# Altium PCB pcb3.PcbDoc
Units mm, origin at the board's own origin, x right, y up, seen from the top; angles counter-clockwise.
Board outline 67.69 x 153.16 mm, 2 copper layers (Top Layer, Bottom Layer); 98 components, 34 nets, 245 pads, 231 vias.
Unrouted connection lines stored in the file: 71.
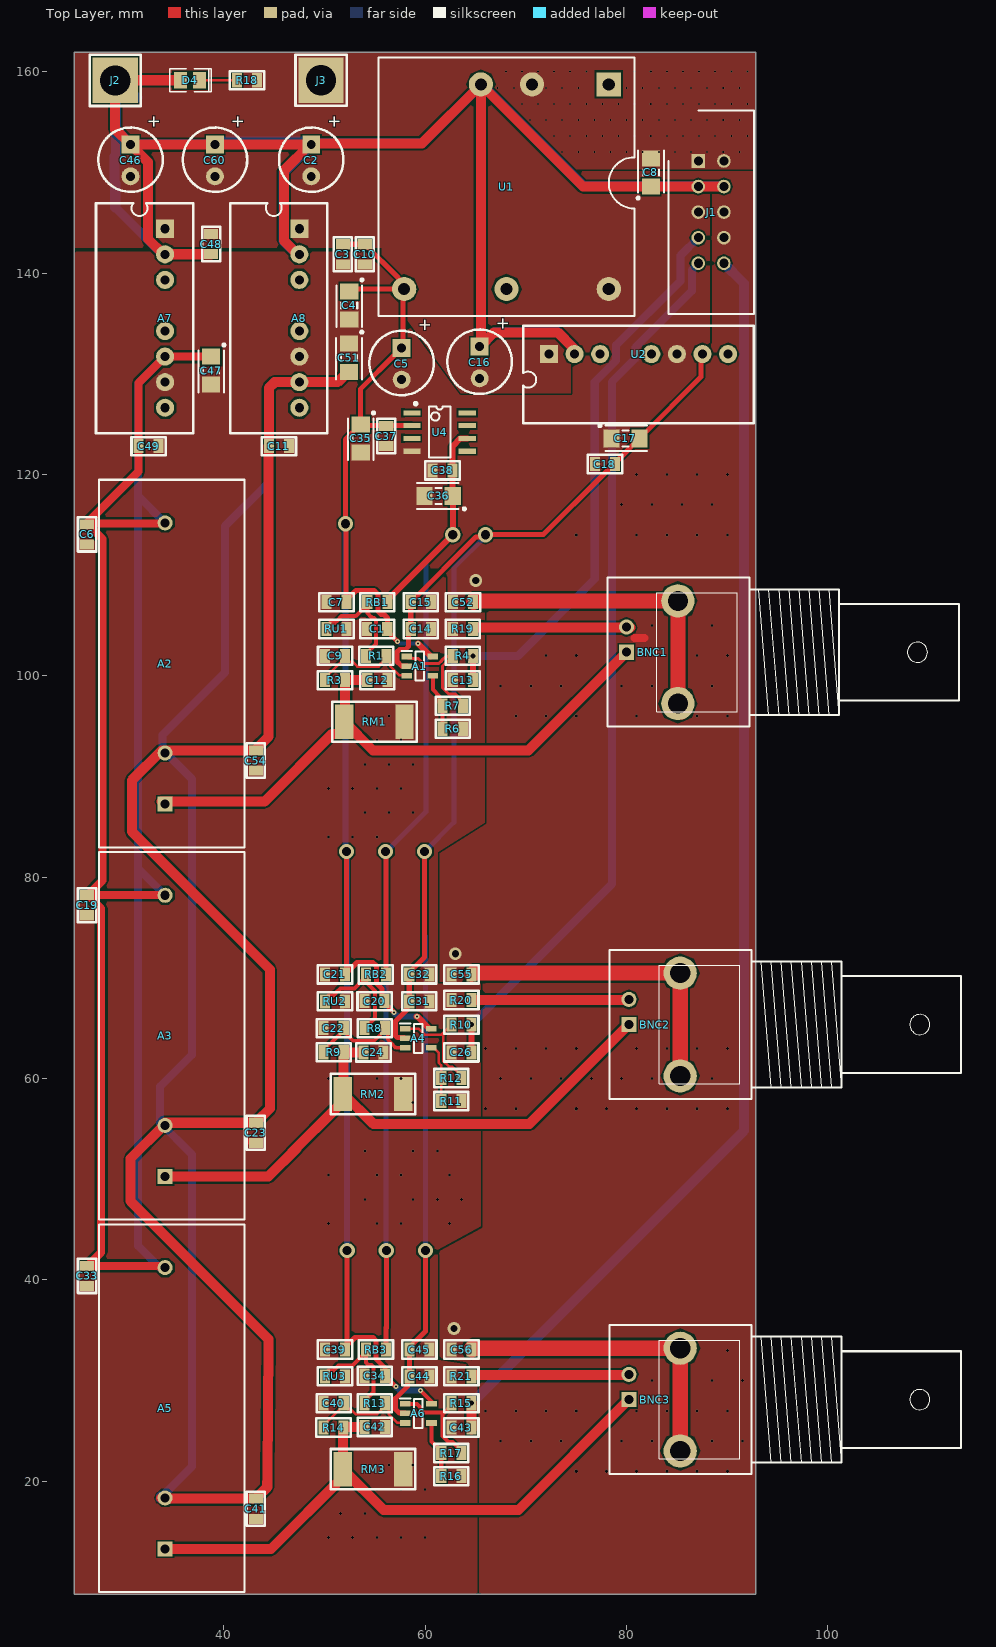
[diagram p0: Top Layer view]
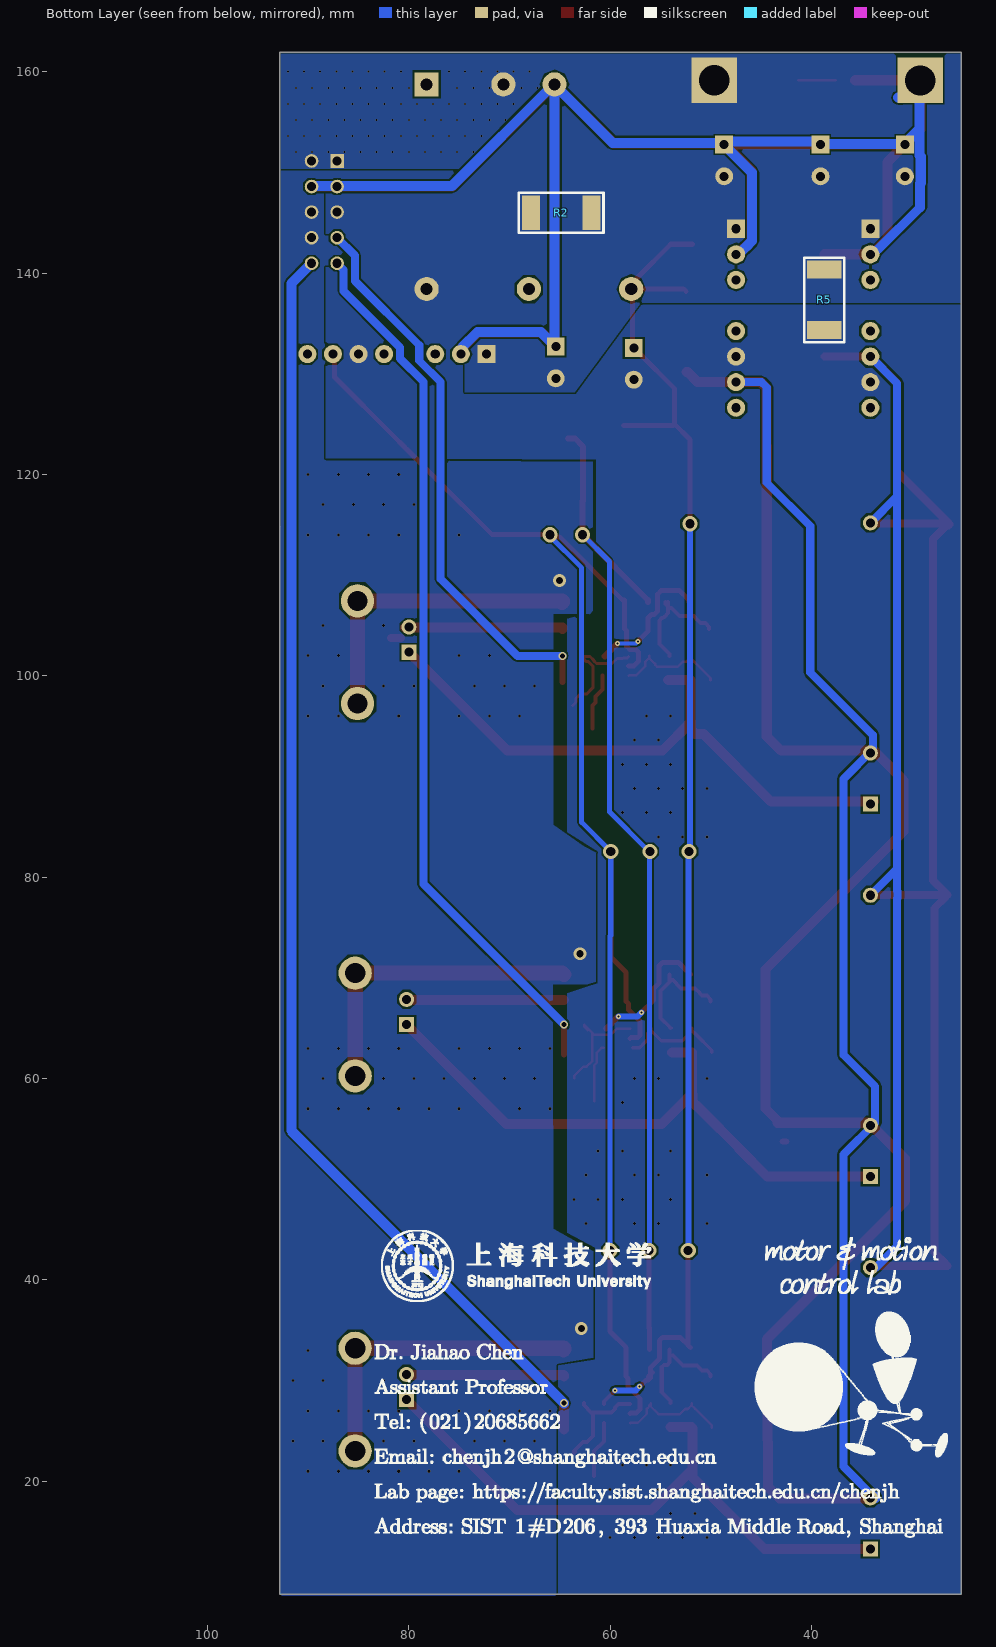
[diagram p1: Bottom Layer view, seen from below]

## Layer stack, top to bottom
Top Solder: solder mask 0.0102, Solder Resist, Dk 3.5
Top Layer: signal copper 0.0356
Dielectric 1: dielectric 0.32, FR-4, Dk 4.8
Bottom Layer: signal copper 0.0356
Bottom Solder: solder mask 0.0102, Solder Resist, Dk 3.5

## Board outline
25.146,8.763 92.837,8.763 92.837,161.925 25.146,161.925

## Design rules (kind name [scope] priority, off if disabled: settings)
AssemblyTestpoint [All] p1: testpointundercomponent=TRUE minsize=1.016 maxsize=0.4 preferedsize=1.524 minholesize=0 maxholesize=1.016 preferedholesize=0.813 testpointgrid=0.025 usegrid=TRUE gridtolerance=0 allowsidetop=TRUE allowsidebottom=TRUE
Clearance [All] p1: gap=0.19 ignorepadtopadclearanceinfootprint=TRUE
ComponentClearance [All] p1: gap=0.254 collisioncheckmode=3 verticalgap=0.2 showdistances=FALSE
FabricationTestpoint [All] p1: side=3 testpointundercomponent=TRUE minsize=1.016 maxsize=0.4 preferedsize=1.524 minholesize=0 maxholesize=1.016 preferedholesize=0.813 testpointgrid=0.025 allowsidetop=TRUE allowsidebottom=TRUE usegrid=TRUE gridtolerance=0
HoleToHoleClearance [All] p1: gap=0.3 allowstackedmicrovias=TRUE
PlaneClearance [All] p1: clearance=0.2
PlaneConnect [All] p1: planeconnectstyle=Direct reliefexpansion=0.508 reliefentries=4 reliefconductorwidth=0.254 reliefairgap=0.254
PolygonConnect [All] p1: connectstyle=Direct reliefconductorwidth=0.254 reliefentries=4 polygonreliefangle="90 Angle" airgapwidth=0.254
RoutingVias [All] p1: holewidth=0.711 width=1.27 viastyle="Through Hole" minholewidth=0.711 minwidth=1.27 maxholewidth=0.711 maxwidth=1.27
SilkToSolderMaskClearance [IsPad] p1: minsilkscreentomaskgap=0.2 clearancetoexposedcopper=TRUE
SolderMaskExpansion [All] p1: expansion=0.102 istentingtop=FALSE
UnRoutedNet [All] p1: checkbadconnections=TRUE
Width [All] p1: maxlimit=10 minlimit=0.254 preferedwidth=0.254
22 further rules are at their usual default settings.

## Components (designator, comment, footprint, x,y, rotation, side; value= is the part's Value field where it differs from the comment)
A1 "LTC6240HV" SOT95P280X100-5N 59.466,100.965 r0 top
A2 "LA55-P" XDCR_LA55-P 34.838,101.219 r90 top
A3 "LA55-P" XDCR_LA55-P 34.838,64.233 r90 top
A4 "LTC6240HV" SOT95P280X100-5N 59.319,63.988 r0 top
A5 "LA55-P" XDCR_LA55-P 34.838,27.248 r90 top
A6 "LTC6240HV" SOT95P280X100-5N 59.321,26.74 r0 top
A7 "VRB1215S-6WR3" VRB_S-6WR3 34.163,144.399 r0 top
A8 "VRB1215S-6WR3" VRB_S-6WR3 47.498,144.399 r0 top
BNC1 "BNC" BNC 79.99,102.342 r180 top
BNC2 "BNC" BNC 80.224,65.365 r180 top
BNC3 "BNC" BNC 80.226,28.117 r180 top
C1 "105" 0805#1 55.229,104.648 r0 top value=101
C2 "100uf 25V 贴片铝电解" "CAP/6.4mm -" 48.682,153.797 r270 top
C3 "105" 0805#1 51.816,141.859 r270 top value=0.1UF
C4 "22uf 16V" "1206 (钽电容)" 52.451,138.182 r270 top
C5 "100uf 25V 贴片铝电解" "CAP/6.4mm -" 57.658,133.604 r270 top
C6 "47nf" 0805#1 26.416,114.046 r90 top
C7 "103" 0805#1 51.181,107.315 r0 top value=101
C8 "22uf 16V" "1206 (钽电容)" 82.423,148.59 r90 top
C9 "101" 0805#1 51.054,101.981 r180 top
C10 "104" 0805#1 53.991,141.859 r90 top
C11 "47nf" 0805#1 45.466,122.809 r180 top
C12 "104" 0805#1 55.245,99.568 r0 top
C13 "103" 0805#1 63.738,99.568 r0 top value=101
C14 "103" 0805#1 59.563,104.648 r180 top value=101
C15 "105" 0805#1 59.563,107.315 r180 top value=101
C16 "100uf 25V 贴片铝电解" "CAP/6.4mm -" 65.405,133.731 r270 top
C17 "22uf 16V" "1206 (钽电容)" 78.486,123.571 r0 top
C18 "104" 0805#1 77.851,121.031 r0 top value=0.1UF
C19 "47nf" 0805#1 26.416,77.216 r90 top
C20 "105" 0805#1 54.975,67.691 r0 top value=101
C21 "103" 0805#1 51.034,70.338 r0 top value=101
C22 "101" 0805#1 50.907,65.004 r180 top
C23 "47nf" 0805#1 43.18,54.61 r270 top
C24 "104" 0805#1 54.86,62.591 r0 top
C26 "103" 0805#1 63.591,62.591 r0 top value=101
C31 "103" 0805#1 59.416,67.671 r180 top value=101
C32 "105" 0805#1 59.416,70.338 r180 top value=101
C33 "47nf" 0805#1 26.416,40.402 r90 top
C34 "105" 0805#1 54.991,30.48 r0 top value=101
C35 "106 25V" "1206 (钽电容)" 53.594,124.968 r270 top value=100pF
C36 "106 25V" "1206 (钽电容)" 62.738,117.856 r180 top value=100pF
C37 "104" 0805#1 56.134,123.809 r90 top
C38 "104" 0805#1 61.722,120.396 r0 top
C39 "103" 0805#1 51.036,33.09 r0 top value=101
C40 "101" 0805#1 50.909,27.756 r180 top
C41 "47nf" 0805#1 43.18,17.272 r270 top
C42 "104" 0805#1 54.991,25.4 r0 top
C43 "103" 0805#1 63.593,25.343 r0 top value=101
C44 "103" 0805#1 59.418,30.423 r180 top value=101
C45 "105" 0805#1 59.418,33.09 r180 top value=101
C46 "100uf 25V 贴片铝电解" "CAP/6.4mm -" 30.734,153.797 r270 top
C47 "22uf 16V" "1206 (钽电容)" 38.735,131.711 r270 top
C48 "104" 0805#1 38.735,142.875 r270 top value=101
C49 "104" 0805#1 32.528,122.809 r0 top value=0.1UF
C51 "22uf 16V" "1206 (钽电容)" 52.428,132.983 r270 top
C52 "102" 0805#1 63.754,107.315 r180 top
C54 "104" 0805#1 43.18,91.583 r90 top value=0.1UF
C55 "102" 0805#1 63.607,70.338 r180 top
C56 "102" 0805#1 63.609,33.09 r180 top
C60 "100uf 25V 贴片铝电解" "CAP/6.4mm -" 39.116,153.797 r270 top
D4 "LED0" l0805 35.692,159.149 r180 top
J1 "HIF3FC-10PA-2.54DSA_71_" SHDR10W50P254_2X5_2020X850X920P 87.122,151.13 r270 top
J2 "Header 2" 接地柱M3 29.21,159.131 r0 top
J3 "Header 2" 接地柱M3 49.657,159.149 r0 top
R1 "20k" 0805#1 55.134,101.981 r0 top value=10K
R2 "DNP" 2512 64.77,145.669 r0 bottom
R3 "10k" 0805#1 51.038,99.568 r180 top value=10K
R4 "470R" 0805#2 63.738,101.981 r180 top
R5 "DNP" 2512 38.411,137.432 r270 bottom
R6 "20k" 0805#1 62.738,94.742 r180 top value=10K
R7 "10k" 0805#1 62.738,97.028 r180 top value=10K
R8 "20k" 0805#1 54.987,65.004 r0 top value=10K
R9 "10k" 0805#1 50.911,62.611 r180 top value=10K
R10 "470R" 0805#2 63.591,65.353 r180 top
R11 "20k" 0805#1 62.591,57.765 r180 top value=10K
R12 "10k" 0805#1 62.591,60.051 r180 top value=10K
R13 "20k" 0805#1 54.989,27.756 r0 top value=10K
R14 "10k" 0805#1 50.893,25.343 r180 top value=10K
R15 "470R" 0805#2 63.593,27.756 r180 top
R16 "20k" 0805#1 62.593,20.517 r180 top value=10K
R17 "10k" 0805#1 62.593,22.803 r180 top value=10K
R18 "1k" 0805#1 42.307,159.149 r180 top value=1K
R19 "0R" 0805#1 63.738,104.648 r0 top value=10K
R20 "0R" 0805#1 63.591,67.798 r0 top value=10K
R21 "0R" 0805#1 63.593,30.423 r0 top value=10K
RB1 "0R" 0805#1 55.245,107.315 r180 top value=10K
RB2 "0R" 0805#1 55.098,70.338 r180 top value=10K
RB3 "0R" 0805#1 55.1,33.09 r180 top value=10K
RM1 "24R 1%精度" 2512 54.864,95.758 r0 top value=3.3K
RM2 "24R 1%精度" 2512 54.717,58.781 r0 top value=3.3K
RM3 "24R 1%精度" 2512 54.719,21.533 r0 top value=3.3K
RU1 "DNP" 0805#1 51.181,104.648 r0 top value=10K
RU2 "DNP" 0805#1 51.034,67.671 r0 top value=10K
RU3 "DNP" 0805#1 51.036,30.423 r0 top value=10K
U1 "URB2405YMD-15W" URB-YMD-15WR3 78.232,158.733 r270 top
U2 "VRB1205S-6WR3" VRB_S-6WR3 72.295,131.953 r90 top
U4 "ADR423ARZ" SOIC-8 58.674,126.111 r0 top value=Value

## Footprints (in the part's own frame and the unit in brackets; to place one, negate y for a bottom-side part, rotate by r counter-clockwise, add the part's x,y. Pads: shape width x height; smd on the part's side, far side on the other; paste and mask are expansions set on the pad)
0805#1 [mm]
  rect 1x1.4 smd: 1(-1,0) 2(1,0)
  silkscreen extent -1.7,-0.9 1.7,0.9
0805#2 [mm]
  rect 1x1.4 smd mask+0.102: 1(-1,0)
  rect 1x1.4 smd: 2(1,0)
  silkscreen extent -1.7,-0.9 1.7,0.9
"1206 (钽电容)" [mm]
  rect 1.6x1.8 smd: 1(0,0) 2(2.8,0)
  silkscreen extent -1.27,-1.27 3.56,1.4
2512 [mm]
  rect 1.8x3.4 smd: 1(-2.903,-0.324) 2(3.097,-0.324)
  silkscreen extent -4.1,-2.32 4.3,1.68
BNC [mm]
  rect 1.5x1.5 hole 0.9: 1(0,0)
  round 1.5 hole 0.9: 2(0,-2.5)
  round 3.3 hole 2: 3(-5.1,5.1) 4(-5.1,-5.1)
  silkscreen extent -33,-7.4 1.9,7.4
"CAP/6.4mm -" [mil]
  rect 70x70 hole 35: 1(41,0)
  round 70 hole 35: 2(165,0)
  silkscreen extent -26,-126 226,126
l0805 [mm]
  rect 1.3x1.6 smd: 1(0,0) 2(-1.9,0)
  silkscreen extent -3.08,-1.15 1.05,1.15
SHDR10W50P254_2X5_2020X850X920P [mm]
  rect 1.35x1.35 hole 0.9: 1(0,0)
  round 1.35 hole 0.9: 2(0,2.54) 3(2.54,0) 4(2.54,2.54) 5(5.08,0) 6(5.08,2.54) 7(7.62,0) 8(7.62,2.54) 9(10.16,0) 10(10.16,2.54)
  silkscreen extent -5.02,-2.98 15.18,5.52, body extent -5.02,-2.98 15.18,5.52, height 9.2
SOIC-8 [mm]
  rect 1.7x0.51 smd: 1(0,0) 2(0,-1.27) 3(0,-2.54) 4(0,-3.81) 5(5.5,-3.81) 6(5.5,-2.54) 7(5.5,-1.27) 8(5.5,0)
  silkscreen extent 0.35,-4.44 3.82,0.94
SOT95P280X100-5N [mm]
  rect 1.05x0.55 smd: 1(-1.3,0.95) 2(-1.3,0) 3(-1.3,-0.95) 4(1.3,-0.95) 5(1.3,0.95)
  silkscreen extent -1.83,-1.45 0.43,1.48, body extent -1.4,-1.45 1.4,1.45, height 1
URB-YMD-15WR3 [mm]
  rect 2.4x2.4 hole 1.2: 1(0,0)
  round 2.4 hole 1.2: 2(0,-7.62) 3(0,-12.7) 4(20.32,-20.32) 5(20.32,-10.16) 6(20.32,0)
  silkscreen extent -2.67,-22.86 22.99,2.54
VRB_S-6WR3 [mm]
  rect 1.8x1.8 hole 0.9: 1(0,0)
  round 1.8 hole 0.9: 2(0,-2.54) 3(0,-5.08) 5(0,-10.16) 6(0,-12.7) 7(0,-15.24) 8(0,-17.78)
  silkscreen extent -6.86,-20.32 2.79,2.54
XDCR_LA55-P [mm]
  rect 1.5x1.5 hole 0.9: 1(-13.97,0.675)
  round 1.5 hole 0.9: 2(-8.89,0.675) 3(13.97,0.675)
  silkscreen extent -18.25,-7.22 18.25,7.22
接地柱M3 [mm]
  rect 4.5x4.5 hole 3: 1(0,0)
  silkscreen extent -2.54,-2.54 2.54,2.54

## Part data
A1 A4 A6: library part AO_LTC6240HV, "OP AMP, +-5.5V, 18MHZ, 10V/US, 5TSOT23", Package=sot23-5, Classe=IC, Codice produttore=LTC6240HVHS5#PBF, Farnell #=2294747, Produttore="LINEAR TECHNOLOGY"
A2 A3 A5: "Current Sensor 50A 1 Channel Hall Effect, Closed Loop Bidirectional Module, Single Pass Through", Package="Module LEM USA", Availability=Unavailable, MF="LEM USA", MP="LA 55-P", Price=None, SnapEDA_Link=https://www.snapeda.com/parts/LA%2055-P/LEM%20USA%20Inc./view-part/38924/?ref=snap
A7 A8 U1 U2: library part Component_1
  U1 U2: ClassName=Power
BNC1 BNC2 BNC3: "BNC Elbow Connector", LatestRevisionDate=17-Jul-2002, LatestRevisionNote="Re-released for DXP Platform.", Publisher="Altium Limited"
C1 C3 C7 C9 C13 C14 C15 C18 C20 C21 C22 C26 C31 C32 C34 C39 C40 C43 C44 C45 C48 C49 C54: library part Cap, "Capacitor", LatestRevisionDate=17-Jul-2002, LatestRevisionNote="Re-released for DXP Platform.", PackageReference=RAD-0.3, Published=8-Jun-2000, Publisher="Altium Limited"
  C3 C18: ClassName=Power
C2 C4 C5 C8 C16 C17 C46 C47 C51 C60: library part "Cap Pol1", "Polarized Capacitor (Radial)", LatestRevisionDate=17-Jul-2002, LatestRevisionNote="Re-released for DXP Platform.", Published=8-Jun-2000, Publisher="Altium Limited"
  C2 C4 C5 C16 C17: ClassName=Power
C6 C10 C11 C12 C19 C23 C24 C33 C37 C38 C41 C42 C52 C55 C56: library part "Cap Semi", "Capacitor (Semiconductor SIM Model)", LatestRevisionDate=17-Jul-2002, LatestRevisionNote="Re-released for DXP Platform.", PackageReference=C1206, Published=8-Jun-2000, Publisher="Altium Limited"
  C10 C37 C38: ClassName=Power
C35 C36: library part "Cap Pol3", "Polarized Capacitor (Surface Mount)", ClassName=Power, LatestRevisionDate=29-May-2009, LatestRevisionNote="IPC-7351 Footprint Added.", PackageDescription="Chip Capacitor", PackageReference=C0805, Published=8-Jun-2000, Publisher="Altium Limited"
D4: "Typical INFRARED GaAs LED", LatestRevisionDate=08-Jul-2005, LatestRevisionNote="Mech Layer 1 removed.", PackageDescription="LED; 2 Leads", PackageReference=LED-0, Published=8-Jun-2000, Publisher="Altium Limited"
J1: "Connector", Manufacturer_Name=Hirose, Manufacturer_Part_Number=HIF3FC-10PA-2.54DSA(71), Mouser Part Number=798-HIF3FC10PA254D71, Datasheet Link=https://componentsearchengine.com/Datasheets/1/HIF3FC-10PA-2.54DSA(71).pdf, Height=9.2mm, Mouser Price/Stock=https://www.mouser.co.uk/ProductDetail/Hirose-Connector/HIF3FC-10PA-2.54DSA71?qs=eDUdFcBPps26f2LJxn%252B8VA%3D%3D
J2 J3: library part "Header 2_1", "Header, 2-Pin", LatestRevisionDate=17-Jul-2002, LatestRevisionNote="Re-released for DXP Platform.", Publisher="Altium Limited"
R1 R2 R3 R4 R5 R6 R7 R8 R9 R10 R11 R12 R13 R14 R15 R16 R17 R18 R19 R20 R21 RB1 RB2 RB3 RM1 RM2 RM3 RU1 RU2 RU3: library part Res2, "Resistor", LatestRevisionDate=17-Jul-2002, LatestRevisionNote="Re-released for DXP Platform.", PackageReference=AXIAL-0.4, Published=8-Jun-2000, Publisher="Altium Limited"
  R2 R5: ClassName=Power
  R18 RM1 RM2 RM3: PackageDescription="Axial Device, Thru-Hole; 2 Leads; 0.4 in Pin Spacing"
U4: "Imported", ClassName=Power, Manufacturer_Part_Number=ADR423ARZ, RefDes=Refdes, Type=Type, Vendor=Vendor

## Via types
v1: diameter 0.3, hole 0.3, Top Layer to Bottom Layer, tented both sides, 128 vias
v2: diameter 0.2, hole 0.2, Top Layer to Bottom Layer, tented both sides, 82 vias
v3: diameter 1.5, hole 0.9, Top Layer to Bottom Layer, 9 vias
v4: diameter 0.5, hole 0.2, Top Layer to Bottom Layer, tented both sides, 6 vias
v5: diameter 0.8, hole 0.5, Top Layer to Bottom Layer, 3 vias
v6: diameter 1.27, hole 0.711, Top Layer to Bottom Layer, 3 vias

## Nets (pads, with @x,y where several pads share a name; then routed paths per layer and width w, separated by ;. In a path a pad name is that pad's centre, name@x,y a point inside that pad or via, vN(x,y) a via of type N, cw(c..) or ccw(c..) an arc to the next point about the centre after c; other vN are vias at no path point)
A+5V: A1.5 A4.5 A6.5 C1.2 C3.1 C4.1 C5.1 C7.2 C10.2 C20.2 C21.2 C34.2 C35.1 C37.2 C39.2 U1.4 U4.2 | length 186.7
  Top Layer w0.4: v4(59.545,29.026) 60.621,27.95 A6.5
  Top Layer w0.5: C3.1 C10.2 57.296,139.554 57.296,139.544 57.912,138.927 U1.4 ; C21.2 52.181,70.485 C21.2@52.181,70.685 ; C39.2@52.036,33.29 C39.2@52.253,33.506 ; C7.2@52.069,107.642 52.133,107.705 52.133,115.049 v3(52.085,115.097) 52.085,123.459 C35.1 53.594,128.499 57.096,132.001 57.223,132.001 57.912,132.69 57.8,132.801 57.8,138.302 U1.4 ; v3(52.181,82.55) C21.2@52.181,70.685 ; C7.2 52.181,107.642 52.308,107.642 53.135,108.469 54.933,108.469 55.291,108.111 55.291,106.427 55.632,106.086 55.903,106.086 56.244,105.744 C1.2@56.244,104.663 ; v3(52.253,42.926) C39.2@52.253,33.506 ; C4.1 52.698,138.429 57.897,138.429 U1.4 ; C35.1@53.721,124.841 56.261,124.841 U4.2 ; C34.2@55.791,30.823 C34.2@55.991,30.623 ; C34.2@56.191,30.423 C34.2@55.991,30.623 ; C1.2 56.229,104.448 57.236,103.441 57.236,103.402 v4(57.255,103.383) ; v4(56.896,66.548) 56.896,66.57 55.725,67.741 55.725,68.889 55.158,69.456 55.158,71.171 54.801,71.528 53.224,71.528 52.434,70.738 52.234,70.738 C21.2@52.181,70.685 ; v4@57.072,29.399 56.391,30.08 56.191,30.08 55.991,30.28 55.991,30.38 C34.2 C34.2@55.991,30.623 ; C39.2@52.253,33.506 53.036,34.29 54.808,34.29 55.1,33.997 55.1,32.182 55.991,31.292 C34.2@55.991,30.623
  Top Layer w0.6: v4(59.161,66.167) 59.19,66.167 A4.5@60.394,64.963 ; v4(59.266,103.224) 59.266,103.215 A1.5@60.541,101.94
  Bottom Layer w0.4: v4(57.255,103.383) 57.283,103.383 57.442,103.224 v4(59.266,103.224)
  Bottom Layer w0.6: v3(52.085,115.097) 52.085,82.646 52.217,82.514 52.217,42.962 v3(52.253,42.926) ; v4(56.896,66.548) 57.277,66.167 v4(59.161,66.167) ; v4(57.088,29.399) 57.461,29.026 v4(59.545,29.026)
A+15V: A2.3 A3.3 A5.3 A7.6 C6.2 C19.2 C33.2 C47.1 C49.1 | length 223.3
  Top Layer w0.8: C6.2@26.289,115.046 26.405,114.93 26.605,114.93 27.94,113.595 27.94,79.683 26.716,78.459 26.716,78.316 26.632,78.232 26.489,78.232 A3.3@33.915,78.232 ; C19.2@26.6,78.232 26.716,78.116 26.716,78.005 27.813,76.908 27.813,42.726 26.716,41.629 26.716,41.502 26.616,41.402 26.489,41.402 33.499,41.402 A5.3@33.683,41.218 ; A2.3 34.091,115.117 26.36,115.117 31.528,120.285 C49.1 31.528,129.064 A7.6 38.723,131.699 C47.1
  Bottom Layer w0.8: A5.3@33.683,41.218 33.666,41.2 31.496,43.37 31.496,77.889 31.457,77.928 31.457,78.59 31.496,78.629 31.496,80.87 ; A3.3 31.496,80.87 ; A2.3 31.496,117.856 ; A7.6 31.496,129.032 31.496,117.856 ; 31.496,80.87 31.496,117.856
A-5V: A1.2 A4.2 A6.2 C14.2 C15.2 C17.2 C18.2 C31.2 C32.2 C44.2 C45.2 U2.7 | length 160.8
  Top Layer w0.5: A4.2 57.944,64.063 57.257,64.063 57.023,64.297 57.023,65.659 58.166,66.802 58.166,67.421 C31.2 C32.2 58.416,70.538 59.944,72.066 v3(59.944,82.55) ; A6.2 57.996,26.765 57.439,26.765 57.023,27.181 57.023,28.198 58.218,29.394 58.218,30.223 C44.2 C45.2 58.418,33.29 60.015,34.887 v3(60.015,42.926) ; A1.2 58.141,100.99 57.633,100.99 57.201,101.422 57.201,102.372 57.459,102.63 58.07,102.63 58.363,102.923 58.363,104.448 C14.2 C15.2 ; C15.2@58.563,107.515 C15.2 ; v3(65.985,114.008) 65.774,113.798 65.046,113.798 C15.2 ; v3@65.985,114.046 71.755,114.046 77.611,119.902 80.19,122.481 80.196,122.481 80.424,122.709 80.424,122.715 81.507,123.798 87.376,129.667 U2.7@87.376,131.953
  Bottom Layer w0.5: v3(60.015,42.926) 60.015,74.144 59.944,74.215 v3(59.944,82.55) 62.837,85.443 62.837,110.716 v3@66.057,113.936
A-15V: A2.2 A3.2 A5.2 A8.7 C11.2 C23.1 C41.1 C51.2 C54.2 | length 285.5
  Top Layer w1: A5.2@33.782,18.358 A5.2 34.249,18.272 C41.1 ; A2.2@33.828,92.583 30.861,89.616 30.861,84.536 44.577,70.82 44.577,57.023 43.38,55.826 43.38,55.61 34.184,55.61 A3.2@33.917,55.343 ; A2.2@33.917,92.583 43.053,92.583 44.45,93.98 C11.2@44.45,122.809 ; A3.2 34.028,55.343 30.734,52.05 30.734,47.818 44.445,34.107 44.445,33.688 44.445,33.683 44.324,20.722 44.312,19.42 C41.1@43.38,18.488 ; C11.2 44.466,128.573 45.052,129.159 A8.7 51.304,129.159 52.328,130.183 C51.2
  Bottom Layer w0.8: A5.2@33.626,18.259 36.83,21.463 36.83,52.457 33.681,55.606 33.681,59.208 36.83,62.357 36.83,89.763 33.919,92.674 33.919,94.117 40.132,100.33 40.132,114.861 44.45,119.179 44.45,128.651 44.958,129.159 A8.7 ; A5.2@33.683,18.358 A5.2@33.683,18.57
AGND: A7.7 A8.6 C1.1 C3.2 C4.2 C5.2 C6.1 C7.1 C9.2 C10.1 C11.1 C12.2 C13.1 C14.1 C15.1 C17.1 C18.1 C19.1 C20.1 C21.1 C22.2 C23.2 C24.2 C26.1 C31.1 C32.1 C33.1 C34.1 C35.2 C36.2 C37.1 C38.1 C39.1 C40.2 C41.2 C42.2 C43.1 C44.1 C45.1 C47.2 C49.2 C51.1 C54.1 J1.5 R2.2 R5.2 R6.1 R11.1 R16.1 R19.1 R20.1 R21.1 RM1.2 RM2.2 RM3.2 RU1.2 RU2.2 RU3.2 U1.6 U2.6 U4.4 | length 0.4
  Top Layer w0.6: 42.472,53.737 C23.2@42.872,53.737
  other v1: 50.4,14.4 52.8,14.4 55.2,14.4 57.6,14.4 60,14.4 51.6,16.8 54,16.8 55.2,19.2 57.6,19.2 60,19.2 54,21.6 56.4,21.6 58.8,21.6 50.4,45.6 55.2,45.6 57.6,45.6 62.4,45.6 54,48 58.8,48 61.2,48 63.6,48 50.4,50.4 55.2,50.4 57.6,50.4 62.4,50.4 54,52.8 58.8,52.8 61.2,52.8 58.8,57.6 50.4,60 55.2,60 57.6,60 50.4,84 52.8,84 55.2,84 54,86.4 56.4,86.4 58.8,86.4 50.4,88.8 52.8,88.8 55.2,88.8 57.6,88.8 54,91.2 56.4,91.2 58.8,91.2 55.2,93.6 57.6,93.6 54,96 56.4,96
CSO1: A2.1 BNC1.1 C12.1 R3.1 RM1.1 | length 61.5
  Top Layer w1: A2.1@33.828,87.503 44.029,87.503 50.761,94.234 51.561,94.234 51.961,94.634 RM1.1 ; C12.1 R3.1 52.038,95.512 RM1.1 ; BNC1.1 70.231,92.583 54.812,92.583 RM1.1
CSO2: A3.1 BNC2.1 C24.1 R9.1 RM2.1 | length 62.1
  Top Layer w1: A3.1 44.42,50.263 47.242,53.086 ; 46.704,52.61 51.351,57.257 51.414,57.257 51.814,57.657 RM2.1 RM2.1@51.891,58.457 ; C24.1 51.891,62.591 RM2.1@51.891,58.457 ; BNC2.1 70.358,55.499 54.849,55.499 RM2.1@51.891,58.457
CSO3: A5.1 BNC3.1 C42.1 R14.1 RM3.1 | length 62.3
  Top Layer w1: A5.1 44.685,13.278 51.816,20.409 RM3.1 ; C42.1 51.951,25.4 R14.1 51.816,25.265 RM3.1 ; BNC3.1 69.255,17.145 55.88,17.145 RM3.1
D12V1: A7.2 A8.2 C2.1 C8.1 C16.1 C46.1 C48.2 C60.1 D4.1 J1.3 J1.4 J2.1 U1.3 U2.2 | length 285.3
  Top Layer w1: J2.1 29.21,154.28 C46.1 ; J2.1@29.591,159.149 D4.1 ; C48.2 38.727,141.867 34.171,141.867 A7.2 33.998,141.859 32.48,143.377 32.48,151.01 C46.1 ; A8.2 47.49,141.867 47.325,141.867 45.958,143.234 45.958,150.159 C2.1@48.555,152.756 ; C2.1 C2.1@48.555,152.756 ; C2.1@48.682,152.883 59.681,152.883 U1.3 ; C16.1 66.827,134.112 73.152,134.112 74.682,132.582 74.682,131.959 U2.2@74.676,131.953 ; C16.1@65.532,133.234 U1.3 ; J1.4 J1.3 C8.1 75.675,148.59 U1.3 ; C46.1 C60.1 C2.1@48.555,152.756
  Bottom Layer w0.9: 29.218,146.527 33.357,142.389 33.389,142.389 33.878,141.9 A7.2@34.122,141.9
  Bottom Layer w1: J2.1 30.919,157.422 J2.1@31.404,157.422 ; 29.218,146.527 29.218,148.888 29.155,148.952 29.155,151.577 29.273,151.696 29.273,154.321 ; J2.1@29.273,159.067 29.273,154.321 ; C46.1 30.345,153.145 30.345,153.25 29.273,154.321 ; C46.1@30.775,152.797 C60.1@39.075,152.797 ; C60.1 39.411,153.051 48.386,153.051 C2.1 48.85,152.924 59.745,152.924 U1.3@65.532,158.711 ; A8.2@47.457,141.9 47.24,141.9 46.52,142.621 46.494,142.621 45.908,143.207 45.908,149.96 48.293,152.345 48.293,152.367 48.66,152.734 C2.1@48.682,152.734 ; U2.2 74.682,132.106 74.682,132.66 73.188,134.153 66.891,134.153 65.816,133.079 65.794,133.079 C16.1 65.532,132.817 U1.3 65.637,158.733 75.739,148.631 J1.3@87.081,148.631 ; J1.3@87.163,148.631 J1.4@89.621,148.631
D12VGND: A7.1 A8.1 C2.2 C8.2 C16.2 C46.2 C48.1 C60.2 J1.1 J1.2 J3.1 R2.1 R5.1 R18.1 U1.2 U2.1
  other v2: 73.6,152 75.2,152 76.8,152 78.4,152 80,152 81.6,152 83.2,152 84.8,152 86.4,152 88,152 89.6,152 91.2,152 72.8,153.6 74.4,153.6 76,153.6 77.6,153.6 79.2,153.6 80.8,153.6 82.4,153.6 84,153.6 85.6,153.6 87.2,153.6 88.8,153.6 90.4,153.6 92,153.6 70.4,155.2 72,155.2 73.6,155.2 75.2,155.2 76.8,155.2 78.4,155.2 80,155.2 81.6,155.2 83.2,155.2 84.8,155.2 86.4,155.2 88,155.2 89.6,155.2 91.2,155.2 69.6,156.8 71.2,156.8 72.8,156.8 74.4,156.8 76,156.8 77.6,156.8 79.2,156.8 80.8,156.8 82.4,156.8 84,156.8 85.6,156.8 87.2,156.8 88.8,156.8 90.4,156.8 92,156.8 67.2,158.4 68.8,158.4 70.4,158.4 72,158.4 73.6,158.4 75.2,158.4 80,158.4 81.6,158.4 83.2,158.4 84.8,158.4 86.4,158.4 88,158.4 89.6,158.4 91.2,158.4 68,160 69.6,160 71.2,160 72.8,160 74.4,160 76,160 80.8,160 82.4,160 84,160 85.6,160 87.2,160 88.8,160 90.4,160 92,160
NetA1_1: A1.1 R4.2 R7.1 | length 11.8
  Top Layer w0.3: A1.1 58.291,101.79 58.654,101.79 58.717,101.727 59.313,101.727 59.821,101.219 61.351,101.219 61.631,101.499 61.631,101.535 62.009,101.913 R4.2@62.67,101.913 ; R4.2 62.738,101.781 62.365,101.408 62.165,101.408 61.722,100.965 61.722,98.806 62.359,98.169 62.994,98.169 63.388,97.775 63.388,97.378 R7.1
NetA1_3: A1.3 C9.1 R1.2 R3.2 | length 11.4
  Top Layer w0.254: R3.2 50.038,99.768 51.678,101.408 51.681,101.408 C9.1@52.054,101.781 ; C9.1 C9.1@52.054,101.781 ; R1.2 56.134,101.781 56.507,101.408 56.507,100.973 57.409,100.071 58.11,100.071 A1.3 ; R1.2@56.189,101.725 56.078,101.725 55.544,101.191 55.544,101.08 55.364,100.9 53.278,100.9 52.77,101.408 52.427,101.408 C9.1@52.054,101.781
NetA1_4: A1.4 R6.2 R7.2 | length 5.7
  Top Layer w0.4: A1.4 60.766,98.619 61.438,97.947 61.438,97.328 R7.2 R6.2
NetA4_1: A4.1 R10.2 R12.1 | length 11.9
  Top Layer w0.254: A4.1 59.371,64.938 59.963,64.346 61.584,64.346 61.774,64.536 ; R10.2@62.218,64.78 62.591,65.153 R10.2@62.591,65.279 ; R10.2@62.218,64.906 R10.2@62.591,65.279 ; R12.1 63.591,60.251 62.65,61.192 62.342,61.192 61.774,61.76 61.774,64.536 ; 61.774,64.536 R10.2 R10.2@62.591,65.279
NetA4_3: A4.3 C22.1 R8.2 R9.2 | length 11.3
  Top Layer w0.35: R9.2 49.911,62.811 51.531,64.431 51.534,64.431 C22.1@51.907,64.804 ; C22.1 C22.1@51.907,64.804 ; R8.2 55.987,64.804 54.937,63.754 52.832,63.754 52.28,64.306 52.28,64.431 52.032,64.679 51.907,64.679 C22.1@51.907,64.804 ; R8.2@56.042,64.748 56.287,64.504 56.287,63.88 56.782,63.385 56.782,63.36 57.104,63.038 A4.3@57.769,63.038
NetA4_4: A4.4 R11.2 R12.2 | length 5.8
  Top Layer w0.254: A4.4 60.869,63.038 61.33,62.577 61.33,61.576 61.591,61.315 R12.2 R11.2
NetA6_1: A6.1 R15.2 R17.1 | length 10.8
  Top Layer w0.4: A6.1 59.181,27.69 59.538,27.333 59.538,27.183 59.865,26.856 61.894,26.856 ; R15.2 62.593,27.556 61.894,26.856 ; R17.1@63.474,22.922 R17.1 63.593,23.003 62.704,23.892 62.293,23.892 61.703,24.481 61.703,26.666 61.894,26.856
NetA6_3: A6.3 C40.1 R13.2 R14.2 | length 11.4
  Top Layer w0.254: R14.2 49.893,25.543 51.533,27.183 51.536,27.183 C40.1@51.909,27.556 ; C40.1 C40.1@51.909,27.556 ; R13.2 55.989,27.556 56.362,27.183 56.362,27.041 56.369,27.034 56.369,26.689 57.264,25.794 58.017,25.794 A6.3 ; R13.2@56.1,27.556 55.219,26.675 53.081,26.675 52.573,27.183 52.282,27.183 C40.1@51.909,27.556
NetA6_4: A6.4 R16.2 R17.2 | length 5.7
  Top Layer w0.4: A6.4 60.621,23.975 61.593,23.003 R16.2
NetBNC1_2: BNC1.2 R19.2 | length 15.8
  Top Layer w1: R19.2 R19.2@64.865,104.775 ; R19.2@64.738,104.775 R19.2@64.865,104.775 ; BNC1.2@80.371,104.775 R19.2@64.865,104.775
NetBNC1_3: BNC1.3 BNC1.4 C52.1 | length 31.8
  Top Layer w1.5: C52.1 C52.1@64.791,107.279 ; C52.1@64.754,107.442 BNC1.4@85.471,107.442 ; BNC1.3 BNC1.4 ; BNC1.3@85.471,96.393 BNC1.3@85.471,97.242
NetBNC2_2: BNC2.2 R20.2 | length 15.6
  Top Layer w1: R20.2 64.718,67.798 BNC2.2@80.224,67.798
NetBNC2_3: BNC2.3 BNC2.4 C55.1 | length 31
  Top Layer w1.5: C55.1 64.734,70.465 BNC2.4 BNC2.3
NetBNC3_2: BNC3.2 R21.2 | length 15.8
  Top Layer w1: R21.2 R21.2@64.72,30.55 ; R21.2@64.593,30.55 R21.2@64.72,30.55 ; BNC3.2@80.226,30.55 R21.2@64.72,30.55
NetBNC3_3: BNC3.3 BNC3.4 C56.1 | length 31
  Top Layer w1.5: C56.1 C56.1@64.646,33.053 ; C56.1@64.609,33.217 BNC3.4 ; BNC3.3@85.326,22.168 BNC3.3 BNC3.4@85.326,32.368
NetD4_2: D4.2 R18.2 | length 3.7
  Top Layer w0.254: D4.2 R18.2
NetR1_1: R1.1 RB1.2 RU1.1 | length 11.9
  Top Layer w0.4: RU1.1 50.181,104.848 50.554,105.221 51.015,105.221 51.291,105.497 51.291,105.51 51.699,105.918 53.102,105.918 53.926,106.742 54.126,106.742 RB1.2@54.245,106.861 ; R1.1 54.134,102.181 55.118,103.165 55.118,103.785 55.119,103.786 55.119,105.51 54.891,105.738 54.787,105.738 54.669,105.857 54.622,105.857 54.245,106.234 RB1.2@54.245,106.861 ; RB1.2 RB1.2@54.245,106.861 ; RB1.2@54.499,107.315 54.499,107.115 RB1.2@54.245,106.861
NetR8_1: R8.1 RB2.2 RU2.1 | length 11.8
  Top Layer w0.4: RB2.2@53.979,69.765 53.779,69.765 52.975,68.961 51.572,68.961 51.144,68.533 51.144,68.52 50.868,68.244 RU2.1@50.407,68.244 ; R8.1 54.991,66.008 54.991,68.718 54.098,69.611 RB2.2 ; RU2.1@50.034,67.871 RU2.1 RU2.1@50.034,67.871 ; RU2.1@50.034,67.871 RU2.1@50.407,68.244 ; RU2.1@50.034,67.871 RU2.1@50.407,68.244
NetR13_1: R13.1 RB3.2 RU3.1 | length 11.3
  Top Layer w0.4: RU3.1 50.036,30.623 50.409,30.996 50.871,30.996 51.379,31.504 52.768,31.504 53.781,32.517 53.981,32.517 RB3.2@54.1,32.636 ; R13.1 53.989,27.956 54.881,28.847 54.881,31.342 54.653,31.57 54.335,31.57 54.1,31.804 RB3.2@54.1,32.636 ; RB3.2 RB3.2@54.1,32.636
PE_GND: C52.2 C55.2 C56.2 J1.6 J1.8 | length 1
  Top Layer w0.8: 80.779,103.759 81.788,103.759
  other v1: 75,21 78,21 81,21 84,21 87,21 90,21 67.5,24 70.5,24 73.5,24 79.5,24 82.5,24 88.5,24 91.5,24 66,27 69,27 72,27 75,27 81,27 84,27 87,27 90,27 82.5,30 88.5,30 91.5,30 90,33 66,57 69,57 75,57 78,57 81,57 84,57 87,57 90,57 67.5,60 70.5,60 73.5,60 76.5,60 79.5,60 82.5,60 88.5,60 66,63 69,63 72,63 75,63 81,63 84,63 87,63 90,63 69,96 72,96 75,96 81,96 87,96 90,96 67.5,99 70.5,99 73.5,99 79.5,99 82.5,99 88.5,99 72,102 75,102 87,102 90,102 82.5,105 88.5,105 75,114 81,114 84,114 87,114 90,114 79.5,117 82.5,117 85.5,117 88.5,117 81,120 84,120 87,120 90,120
  other v6: 62.865,35.179 62.992,72.39 65.024,109.474
REF_3V: C36.1 C38.2 RB1.1 RB2.1 RB3.1 U4.6 | length 115.9
  Top Layer w0.5: RB2.1 56.098,82.514 v3@56.261,82.677 ; RB3.1 56.1,35.263 56.134,35.23 v3(56.134,42.926)
  Top Layer w0.6: RB1.1 56.245,107.515 v3(62.738,114.008) 62.738,117.348 62.722,117.364 62.722,118.69 62.722,120.015 62.722,122.793 63.5,123.571 U4.6
  Bottom Layer w0.5: v3(56.062,82.55) 56.098,82.514 56.098,42.962 v3(56.134,42.926) ; v3@56.261,82.677 60.071,86.487 60.071,111.341 v3(62.738,114.008)
VSO1: C13.2 J1.7 R4.1 | length 56
  Top Layer w0.6: C13.2@64.738,99.368 C13.2 v5(64.738,101.981)
  Bottom Layer w0.8: v5(64.738,101.981) 69.215,101.981 76.835,109.601 76.835,129.164 78.965,131.294 78.965,132.834 85.344,139.213 85.344,141.732 J1.7
VSO2: C26.2 J1.9 R10.1 | length 87.9
  Top Layer w0.6: C26.2@64.591,62.391 C26.2 v5(64.591,65.353)
  Bottom Layer w0.8: v5(64.591,65.353) 78.55,79.312 78.55,129.196 80.865,131.511 80.865,132.612 86.477,138.224 86.477,140.325 J1.9
VSO3: C43.2 J1.10 R15.1 | length 127.9
  Top Layer w1: C43.2@64.593,25.143 C43.2 v5(64.593,27.756)
  Bottom Layer w1: v5(64.593,27.756) 91.665,54.827 91.665,138.967 91.569,139.063 J1.10
pads on no net: A7.3 A7.5 A7.8 A8.3 A8.5 A8.8 U1.1 U1.5 U2.3 U2.5 U2.8 U4.1 U4.3 U4.5 U4.7 U4.8

## Polygon pours and split planes (outlines as drawn)
AGND on Top Layer "AGND_L01_P018" (solid, remove dead copper, pour order 18): 58.039,110.686 58.039,157.925 88.282,157.925 88.282,110.851
AGND on Top Layer "AGND_L01_P020" (solid, remove dead copper, pour order 20): 25.146,142.113 25.146,8.795 65.168,8.731 65.168,31.433 61.231,32.068 61.231,42.99 65.532,45.319 65.532,69.421 61.231,69.421 61.231,82.487 65.913,85.413 65.913,106.254 62.04,106.254 62.174,142.113
D12VGND on Top Layer "D12VGND_L01_P017" (solid, remove dead copper, pour order 17): 25.146,161.925 25.146,142.494 55.697,142.494 55.697,138.743 63.547,128.08 74.439,128.08 74.439,161.925
PE_GND on Top Layer "PE_GND_L01_P024" (solid, remove dead copper, pour order 24): 92.727,150.305 92.664,150.368 61.722,150.368 61.722,106.572 62.04,106.254 62.085,106.299 65.786,106.299 65.786,85.429 62.611,83.185 61.231,82.487 61.231,69.469 65.728,69.469 65.639,45.193 61.231,42.99 61.231,32.622 62.42,31.433 65.168,31.433 65.168,8.763 92.837,8.763
D12VGND on Top Layer "D12VGND_L01_P019" (solid, remove dead copper, pour order 19): 92.727,150.305 66.057,150.305 66.057,161.925 92.727,161.925
PE_GND on Bottom Layer "PE_GND_L02_P023" (solid, remove dead copper, pour order 23): 92.727,150.178 92.664,150.241 61.722,150.241 61.722,106.445 62.04,106.127 62.085,106.172 65.639,106.172 65.639,85.198 62.611,83.058 61.231,82.36 61.231,69.342 65.728,69.342 65.639,45.066 61.595,42.799 61.231,32.495 62.42,31.306 65.168,31.306 65.168,8.636 92.837,8.636
AGND on Bottom Layer "AGND_L02_P015" (solid, remove dead copper, pour order 15): 25.146,137.538 25.146,8.763 65.151,8.763 65.151,31.496 61.469,32.09 61.469,43.191 64.262,44.704 64.262,56.896 64.262,68.453 61.214,69.469 61.214,82.55 64.262,84.455 64.262,94.107 64.262,105.664 61.352,106.513 61.469,137.798
AGND on Bottom Layer "AGND_L02_P007" (solid, remove dead copper, pour order 7): 61.087,121.459 61.087,157.988 88.265,157.988 88.265,121.607
D12VGND on Bottom Layer "D12VGND_L02_P003" (solid, remove dead copper, pour order 3): 25.146,161.798 25.146,137.033 56.985,137.033 63.53,128.143 74.422,128.143 74.422,161.798
D12VGND on Bottom Layer "D12VGND_L02_P008" (solid, remove dead copper, pour order 8): 92.71,150.368 66.04,150.368 66.04,161.798 92.71,161.798

## Silkscreen, mask and mechanical layers (free items; w line width, h text height)
Bottom Overlay:
  drawing of 11086 lines, arcs and shapes, not listed
Mechanical 1:
  lines w0.254: 25.019,8.763 92.837,8.763 92.837,161.925 25.019,161.925 25.019,8.763

## Text inside footprints (layer, text, board x,y; h text height)
C2: Top Overlay "+" at 50.079,155.702 h2.03 r270
C5: Top Overlay "+" at 59.055,135.509 h2.03 r270
C16: Top Overlay "+" at 66.802,135.636 h2.03 r270
C46: Top Overlay "+" at 32.131,155.702 h2.03 r270
C60: Top Overlay "+" at 40.513,155.702 h2.03 r270